# Altium PCB RF315Mhz.PcbDoc
Units mm, origin at the board's own origin, x right, y up, seen from the top; angles counter-clockwise.
Board outline 32.5 x 47.16 mm, 2 copper layers (Top Layer, Bottom Layer); 30 components, 20 nets, 107 pads, 7 vias.
Unrouted connection lines stored in the file: 1.
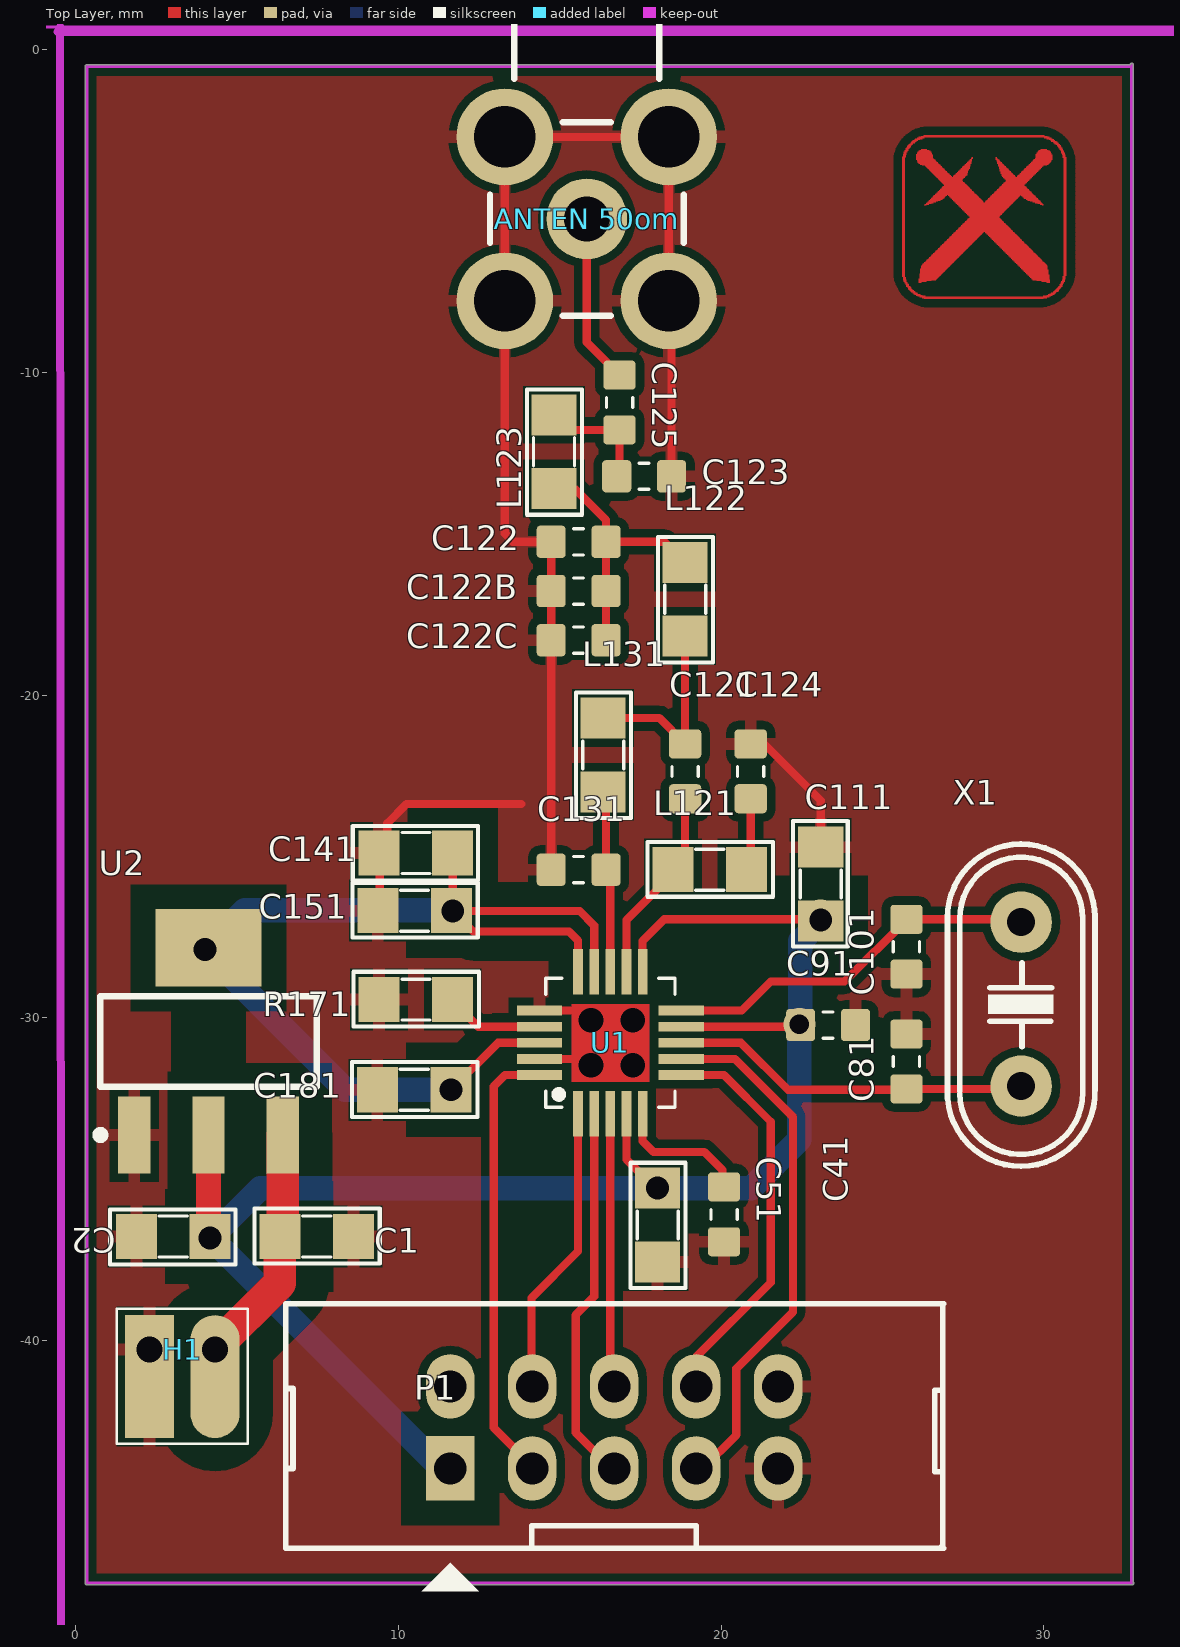
[diagram p0: Top Layer view]
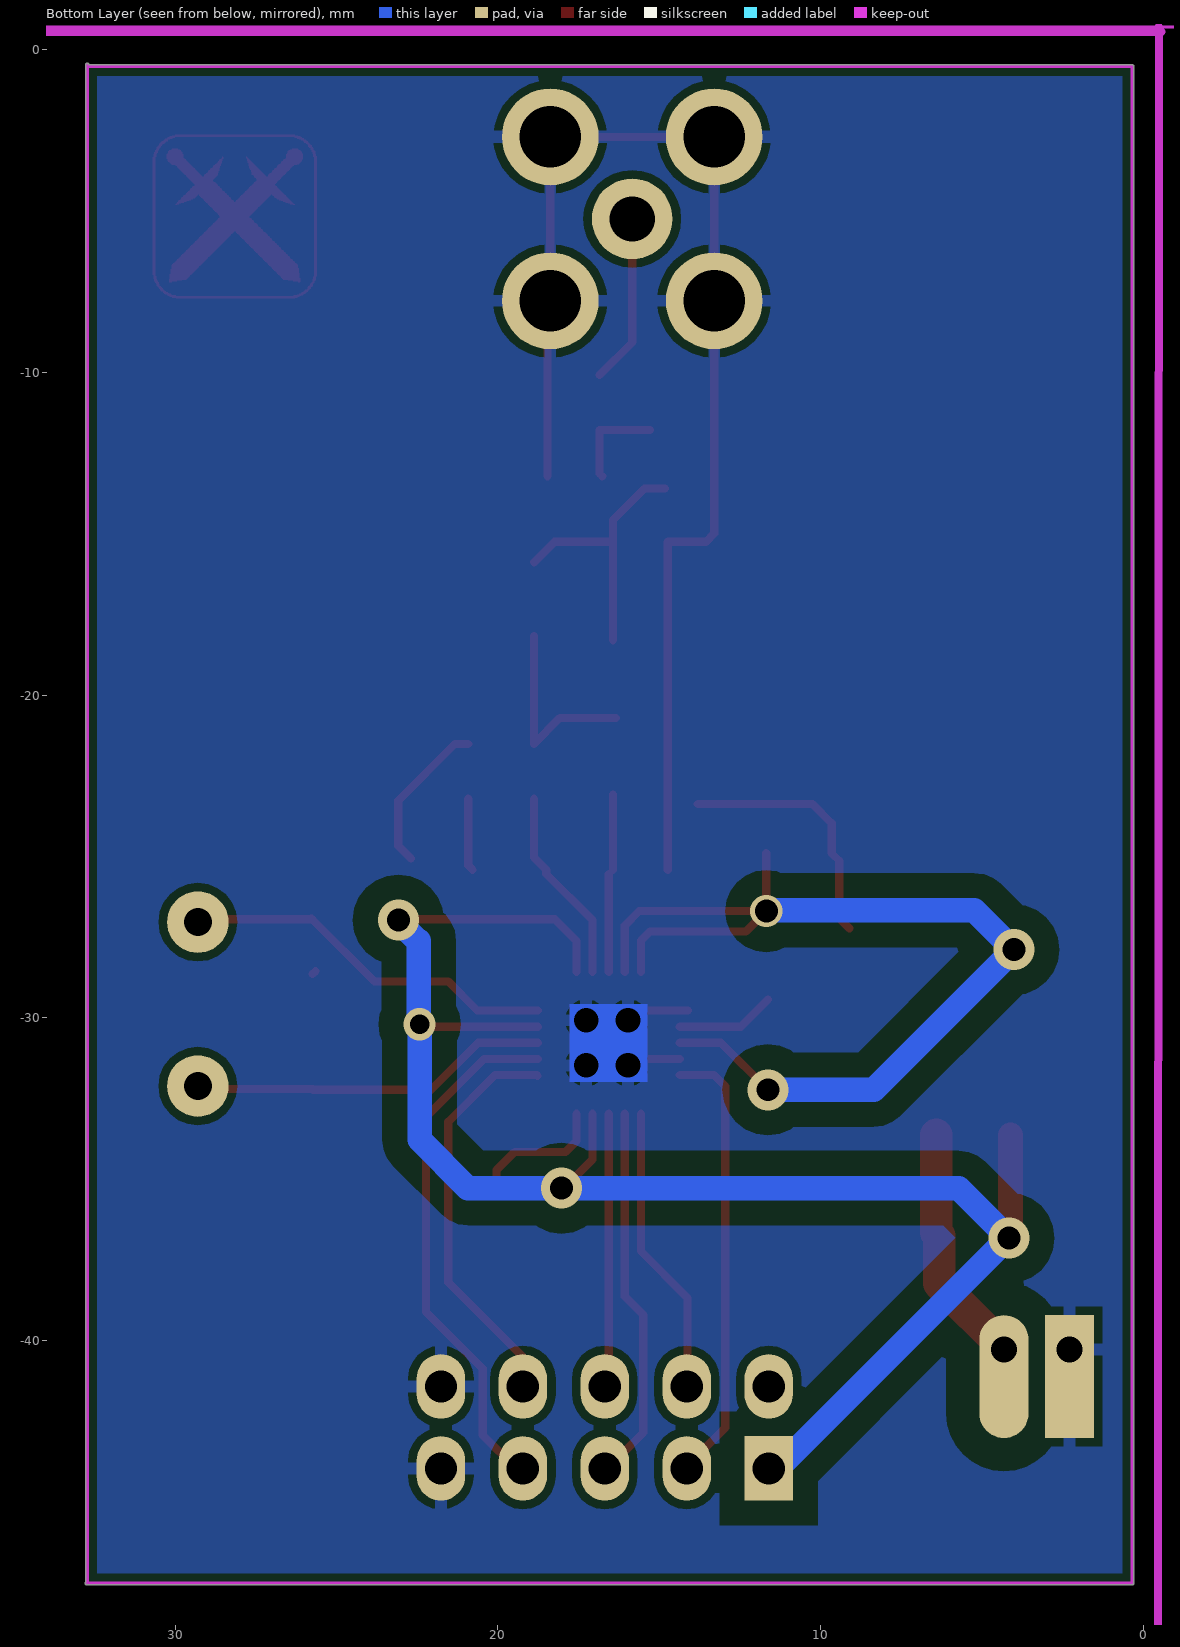
[diagram p1: Bottom Layer view, seen from below]
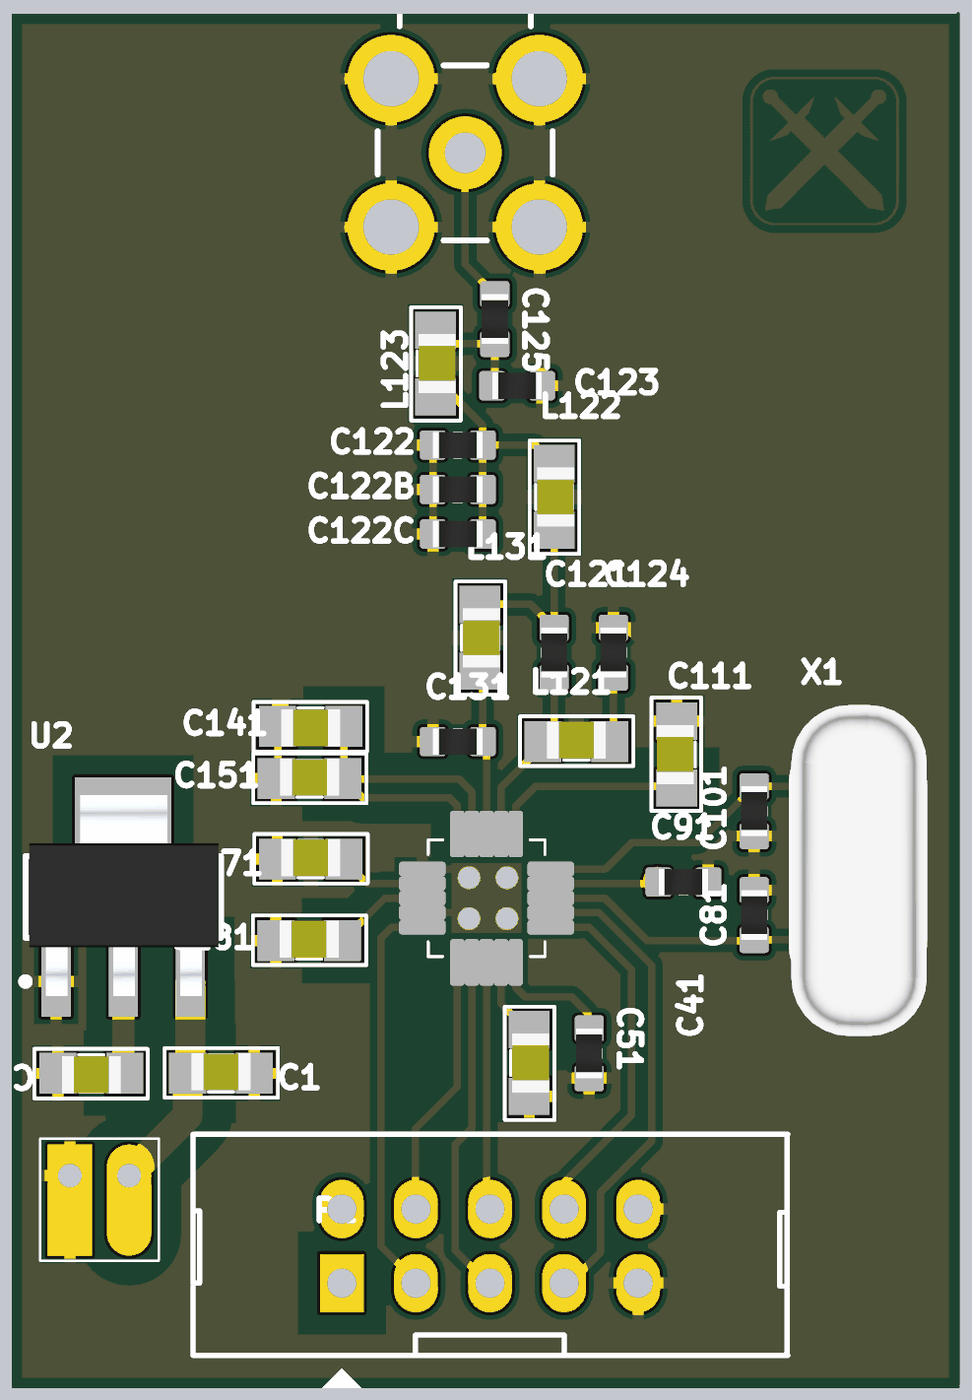
[diagram p2: 3D render of the assembled board from above, using the file's embedded part models]

## Layer stack, top to bottom
Top Layer: signal copper 0.0356
Dielectric: dielectric 0.32, FR-4, Dk 4.8
Bottom Layer: signal copper 0.0356

## Board outline
0.345,-47.574 cw(c0.345,-47.523) 0.294,-47.523 0.294,-0.52 cw(c0.345,-0.52) 0.345,-0.469 32.679,-0.469 cw(c32.73,-0.469) 32.78,-0.469 32.78,-47.459 cw(c32.73,-47.459) 32.773,-47.485 cw(c32.741,-47.523) 32.791,-47.523 cw(c32.741,-47.523) 32.741,-47.574

## Design rules (kind name [scope] priority, off if disabled: settings)
Clearance 5 [InNet('+5V')] p1: gap=1.016
Clearance 3.3 [InNet('+3.3V')] p2: gap=0.762
Clearance [All] p3: gap=0.254
ComponentClearance [All] p1: gap=0.051 collisioncheckmode=3 verticalgap=0.051 showdistances=FALSE
PolygonConnect [All] p1: connectstyle=Relief reliefconductorwidth=0.381 reliefentries=4 polygonreliefangle="90 Angle" airgapwidth=0.254
RoutingVias [All] p1: holewidth=0.711 width=1.27 viastyle="Through Hole" minholewidth=0.711 minwidth=1.27 maxholewidth=0.711 maxwidth=1.27
ShortCircuit [All] p1: allowed=TRUE
SilkToSilkClearance [All] p1: silktosilkclearance=0.051
SilkToSolderMaskClearance [IsPad] p1: minsilkscreentomaskgap=0 clearancetoexposedcopper=TRUE
SolderMaskExpansion [All] p1: expansion=0.102
Width 5v [InNet('+5V')] p1: maxlimit=1.016 minlimit=1.016 preferedwidth=1.016
Width 3.3v [InNet('+3.3V')] p2: maxlimit=0.254 minlimit=0.254 preferedwidth=0.254
Width [All] p3: maxlimit=0.254 minlimit=0.254 preferedwidth=0.254
24 further rules are at their usual default settings.

## Components (designator, comment, footprint, x,y, rotation, side; value= is the part's Value field where it differs from the comment)
"ANTEN 50om" "Header 2" MCX5.08-H5 15.839,1.258 r270 top
C1 "104" SM-0805 7.468,-36.779 r180 top
C2 "104" SM-0805 3.023,-36.779 r0 top
C41 "104" SM-0805 18.034,-36.424 r90 top
C51 "104" 0603ESDA#1 20.091,-36.093 r90 top
C81 "27pF" 0603ESDA#1 25.745,-31.355 r270 top
C91 "103" 0603ESDA#2 23.317,-30.226 r180 top
C101 "27pF" 0603ESDA#1 25.745,-27.799 r90 top
C111 "220pF" SM-0805 23.089,-25.857 r270 top
C121 "6.8pF" 0603ESDA#1 18.887,-22.364 r270 top
C122 "12pF" 0603ESDA#1 15.585,-15.252 r180 top
C122B "12pF" 0603ESDA#1 15.585,-16.776 r180 top
C122C "12pF" 0603ESDA#1 15.585,-18.3 r180 top
C123 "6.8pF" 0603ESDA#1 17.617,-13.22 r0 top
C124 "220pF" 0603ESDA#1 20.919,-22.364 r270 top
C125 "220pF" 0603ESDA#1 16.855,-10.934 r90 top
C131 "6.8pF" 0603ESDA#1 15.585,-25.412 r180 top
C141 "103" SM-0805 10.541,-24.892 r0 top
C151 "220pF" SM-0805 10.505,-26.682 r180 top
C181 "220pF" SM-0805 10.49,-32.233 r180 top
H1 "Header 2" HDR1X2 2.032,-40.284 r0 top
L121 "33nH" SM-0805 19.649,-25.412 r180 top
L122 "18nH" SM-0805 18.887,-17.03 r90 top
L123 "33nH" SM-0805 14.823,-12.458 r90 top
L131 "33nH" SM-0805 16.347,-21.856 r90 top
P1 "Header 6" Hed2X5 11.608,-43.967 r0 top
R171 "56K" SM-0805 10.541,-29.439 r180 top
U1 "CC1101" QFN-20Pin 14.569,-32.778 r90 top
U2 "LM1117" SOT223-4N 4.115,-30.734 r90 top
X1 "26Mhz" XT2 29.301,-29.577 r90 top

## Footprints (in the part's own frame and the unit in brackets; to place one, negate y for a bottom-side part, rotate by r counter-clockwise, add the part's x,y. Pads: shape width x height; smd on the part's side, far side on the other; paste and mask are expansions set on the pad)
0603ESDA#1 [mm] "Chip ESD suppressor, Body 1.6x0.8mm, 0603, IPC Medium Density"
  round 0.254 on Mech14: 0(0,0)
  rrect25% 0.9x1 smd: 1(-0.85,0) 2(0.85,0)
  Top Layer pour cut-out: -0.4,0.6 0.4,0.6 0.4,-0.6 -0.4,-0.6
  silkscreen extent -0.15,-0.41 0.15,0.41, body extent -0.85,-0.45 0.85,0.45, height 0.79
0603ESDA#2 [mm] "Chip ESD suppressor, Body 1.6x0.8mm, 0603, IPC Medium Density"
  round 0.254 on Mech15: 0(0,0)
  rrect25% 0.9x1 smd: 1(-0.85,0) 2(0.85,0)
  Top Layer pour cut-out: -0.65,0.5 -0.45,0.7 0.45,0.7 0.65,0.5 0.65,-0.5 0.45,-0.7 -0.45,-0.7 -0.65,-0.5
  silkscreen extent -0.15,-0.41 0.15,0.41, body extent -0.85,-0.45 0.85,0.45, height 0.79
HDR1X2 [mil] "Connector; Header; 2 Position"
  rect 60x150 hole 32 copper offset 0,-33: 1(10,0)
  oval 60x150 hole 32 copper offset 0,-33: 2(90,0)
  silkscreen extent -30,-115 130,50
Hed2X5 [mm] "Header 10x2,20 pin, connecter"
  rect 1.5x2 hole 1: 1(0,0)
  oval 1.5x2 hole 1: 2(0,2.54) 3(2.54,0) 4(2.54,2.54) 5(5.08,0) 6(5.08,2.54) 7(7.62,0) 8(7.62,2.54) 9(10.16,0) 10(10.16,2.54)
  silkscreen extent -5.1,-3.81 15.29,5.11
MCX5.08-H5 [mm] "Chan anten"
  round 2.5 hole 1.4: 1(6.5,0)
  round 3 hole 1.9: 2(3.96,2.54) 2(3.96,-2.54) 2(9.04,-2.54) 2(9.04,2.54)
  silkscreen extent 0,-3 9.5,3
QFN-20Pin [mm] "QFN 20pin 4x4mm"
  rect 1.4x0.3 smd paste+0.1 mask+0.1: 1(-0.2,-1) 2(-0.2,-1.5) 3(-0.2,-2) 4(-0.2,-2.5) 5(-0.2,-3) 11(4.2,-3) 12(4.2,-2.5) 13(4.2,-2) 14(4.2,-1.5) 15(4.2,-1)
  rect 0.3x1.4 smd paste+0.1 mask+0.1: 6(1,-4.2) 7(1.5,-4.2) 8(2,-4.2) 9(2.5,-4.2) 10(3,-4.2) 16(3,0.2) 17(2.5,0.2) 18(2,0.2) 19(1.5,0.2) 20(1,0.2)
  round 0 hole 0.762: 21(1.3,-1.4) 21(1.3,-2.7) 21(2.7,-2.7) 21(2.7,-1.4)
  Top Layer region: 0.8,-0.8 3.2,-0.8 3.2,-3.2 0.8,-3.2
  Bottom Layer region: 0.8,-0.8 3.2,-0.8 3.2,-3.2 0.8,-3.2
  Top Overlay keep-out circle w0.254: c0.4,-0.4 r0.1
  silkscreen extent 0,-4 4,0
SM-0805 [mil] "Compoment SMD 80x50mil"
  rect 50x55 smd: 1(-45,0) 2(45,0)
  silkscreen extent -77,-34 76,33, body extent -40,-27 40,23, height 24
SOT223-4N [mm] "SOT223, 4-Leads, Body 6.5x3.5mm, Pitch 2.3mm, Lead Span 7mm, IPC Medium Density"
  rect 2.4x1 smd: 1(-2.9,2.3) 2(-2.9,0) 3(-2.9,-2.3)
  rect 2.4x3.3 smd: 4(2.9,0)
  silkscreen extent -3.02,-3.35 1.4,3.47, body extent -3.39,-3.27 3.5,3.23, height 1.72
XT2 [mil] "Footpin for Crystal 2 pin"
  round 75 hole 34: 1(-100,0) 2(100,0)
  silkscreen extent -198,-90 195,90, body extent -233,-93 213,90, height 138

## Part data
"ANTEN 50om" H1: library part Hed2, "Header 2 (Green)"
C1 C2: library part Cap, "Capacitor"
C41 C51 C81 C91 C101 C111 C121 C122 C122B C122C C123 C124 C125 C131 C141 C151 C181: library part CM, "Cap SMD"
L121 L122 L123 L131: library part L1, "Inductor"
P1: "Header, 6-Pin"
R171: library part RM, "Resistor SMD"
U1: "Transceiver 315Mhz"
U2: "3v3"
X1: library part XT2, "Crystal For all Crystal 2pin."

## Via types
v1: diameter 1.27, hole 0.711, Top Layer to Bottom Layer, 5 vias
v2: diameter 1, hole 0.711, Top Layer to Bottom Layer, 1 vias
v3: diameter 1, hole 0.6, Top Layer to Bottom Layer, 1 vias

## Nets (pads, with @x,y where several pads share a name; then routed paths per layer and width w, separated by ;. In a path a pad name is that pad's centre, name@x,y a point inside that pad or via, vN(x,y) a via of type N, cw(c..) or ccw(c..) an arc to the next point about the centre after c; other vN are vias at no path point)
+3.3V: C2.2 C41.2 C91.2 C111.2 C141.2 C151.1 C181.1 P1.1 U1.4 U1.9 U1.11 U1.14 U1.15 U1.18 U2.2 U2.4 | length 87.6
  Top Layer w0.254: v1(11.633,-32.233) 13.088,-30.778 U1.18 ; C151.1@11.684,-26.67 C141.2 ; U1.15 15.569,-27.608 15.291,-27.33 12.319,-27.33 v2(11.684,-26.695) 15.621,-26.695 16.069,-27.143 U1.14 ; U1.4 17.069,-34.391 C41.2@17.958,-35.281 ; U1.11 17.569,-27.618 18.237,-26.949 23.114,-26.949 C111.2@23.165,-27 ; U1.9 22.453,-30.278 C91.2@22.479,-30.251
  Top Layer w0.762: U2.4@4.013,-27.838 U2.4@4.115,-27.94 ; C2.2@4.115,-36.83 U2.2
  Bottom Layer w0.254: v3@22.377,-30.226 v3@22.454,-30.15 ; 22.454,-27.61 22.479,-27.61
  Bottom Layer w0.762: v1(4.166,-36.83) v1@4.178,-36.817 ; P1.1 11.328,-43.967 v1@4.178,-36.817 ; v1(11.633,-32.233) 8.357,-32.233 v1(4.013,-27.889) 5.232,-26.67 v2@11.659,-26.67 ; v1(18.034,-35.281) 20.93,-35.281 22.428,-33.782 22.428,-30.277 v3@22.454,-30.251 ; v1@18.034,-35.23 17.983,-35.281 5.715,-35.281 v1@4.178,-36.817 ; v3(22.428,-30.201) v3@22.454,-30.175 ; v3@22.454,-30.15 22.454,-27.61 ; 22.479,-27.61 v1@23.139,-26.949
  other v1: 23.089,-26.975
+5V: C1.2 H1.2 U2.3 | length 7.5
  Top Layer w1.016: H1.2@4.267,-40.284 6.325,-38.227 C1.2 ; C1.2@6.325,-36.754 6.415,-36.664 U2.3
CSN: P1.7 U1.7 | length 16.5
  Top Layer w0.254: U1.7 20.432,-31.278 22.225,-33.071 22.225,-39.116 20.472,-40.869 20.472,-42.926 19.431,-43.967 P1.7 P1.7@19.202,-43.967
GDO0: P1.8 U1.6 | length 12.5
  Top Layer w0.254: U1.6@18.771,-31.801 18.796,-31.775 20.091,-31.775 21.539,-33.223 21.539,-38.202 19.228,-40.513 P1.8
GDO2: P1.6 U1.3 | length 8.5
  Top Layer w0.254: U1.3 16.569,-41.283 P1.6@16.688,-41.402
GND: "ANTEN 50om.2" C1.1 C2.1 C41.1 C51.1 C81.1 C91.1 C101.1 C111.1 C122.2 C122B.2 C122C.2 C123.2 C124.1 C131.2 C141.1 C151.2 C181.2 H1.1 P1.9 P1.10 R171.2 U1.16 U1.19 U1.21 U2.1 | length 56
  Top Layer w0.254: C151.2@9.108,-27.229 C151.2@9.655,-26.682 ; C151.2@9.423,-26.45 9.423,-25.135 9.655,-24.904 9.655,-23.976 10.251,-23.38 13.807,-23.38 ; U1.16@14.109,-29.778 U1.16 15.63,-29.778 15.951,-30.099 ; U1.19 15.834,-31.278 16.002,-31.445 ; C131.2 14.735,-24.308 C122C.2 C122B.2 C122.2 13.553,-15.252 13.299,-14.998 13.299,-7.782 13.299,-2.702 18.379,-2.702 18.379,-7.782 18.467,-7.87 C123.2 ; C124.1 21.339,-21.514 23.089,-23.264 23.089,-24.678 C111.1@22.697,-25.07 ; C101.1@25.657,-28.561 C101.1
"NetANTEN 50om_1": "ANTEN 50om.1" C125.2 | length 5.3
  Top Layer w0.254: 15.839,-5.242 15.839,-9.068 C125.2
NetC51_2: C51.2 U1.5 | length 4.2
  Top Layer w0.254: U1.5 17.569,-33.825 17.907,-34.163 19.482,-34.163 20.041,-34.722 C51.2@20.041,-35.255
NetC81_2: C81.2 U1.8 X1.1 | length 11
  Top Layer w0.254: U1.8 20.618,-30.778 22.073,-32.233 C81.2@25.73,-32.233 ; C81.2 X1.1@29.213,-32.205
NetC101_2: C101.2 U1.10 X1.2 | length 11.8
  Top Layer w0.254: U1.10 20.641,-29.778 21.539,-28.88 23.825,-28.88 C101.2@25.756,-26.949 ; C101.2@25.781,-26.924 C101.2@25.756,-26.949 ; X1.2 29.213,-26.949 C101.2@25.756,-26.949
NetC121_1: C121.1 L122.1 L131.2 | length 6.2
  Top Layer w0.254: L131.2 18.086,-20.713 C121.1 L122.1
NetC121_2: C121.2 L121.2 U1.12 | length 6.1
  Top Layer w0.254: U1.12 17.069,-26.976 18.506,-25.539 L121.2 18.887,-25.031 C121.2
NetC122_1: C122.1 C122B.1 C122C.1 L122.2 L123.1 | length 8.5
  Top Layer w0.254: L123.1 15.458,-13.601 16.435,-14.578 C122.1 ; C122C.1 C122B.1 C122.1 ; L122.2 18.252,-15.252 C122.1
NetC123_1: C123.1 C125.1 L123.2 | length 3
  Top Layer w0.254: L123.2@15.292,-11.784 C125.1 16.855,-13.132 C123.1
NetC124_2: C124.2 L121.1 | length 2.3
  Top Layer w0.254: L121.1 20.919,-25.285 C124.2
NetC131_1: C131.1 L131.1 U1.13 | length 5.4
  Top Layer w0.254: C131.1 L131.1@16.435,-23.087 ; U1.13 C131.1@16.569,-25.546
NetR171_1: R171.1 U1.17 | length 3.1
  Top Layer w0.254: R171.1@11.633,-29.439 12.472,-30.278 U1.17
SCK: P1.4 U1.1 | length 9
  Top Layer w0.254: P1.4@14.122,-41.427 14.122,-38.684 15.569,-37.238 U1.1
SI: P1.3 U1.20 | length 13.9
  Top Layer w0.254: P1.3@14.199,-43.942 12.954,-42.697 12.954,-32.131 13.307,-31.778 U1.20
SO: P1.5 U1.2 | length 11.8
  Top Layer w0.254: U1.2 16.069,-38.643 15.494,-39.218 15.494,-42.85 P1.5@16.713,-44.069
pads on no net: C51.0 C81.0 C91.0 C101.0 C121.0 C122.0 C122B.0 C122C.0 C123.0 C124.0 C125.0 C131.0 P1.2
copper on no net: | length 404.2
  Top Layer w0.025: 25.618,-7.022 25.694,-7.022 ; 25.618,-6.997 25.694,-6.997 ; 25.618,-6.971 25.694,-6.971 ; 25.618,-6.946 25.694,-6.946 ; 25.618,-6.92 25.694,-6.92 ; 25.618,-6.895 25.694,-6.895 ; 25.618,-6.87 25.694,-6.87 ; 25.618,-6.844 25.694,-6.844 ; 25.618,-6.819 25.694,-6.819 ; 25.618,-6.793 25.694,-6.793 ; 25.618,-6.768 25.694,-6.768 ; 25.618,-6.743 25.694,-6.743 ; 25.618,-6.717 25.694,-6.717 ; 25.618,-6.692 25.694,-6.692 ; 25.618,-6.666 25.694,-6.666 ; 25.618,-6.641 25.694,-6.641 ; 25.618,-6.616 25.694,-6.616 ; 25.618,-6.59 25.694,-6.59 ; 25.618,-6.565 25.694,-6.565 ; 25.618,-6.539 25.694,-6.539 ; 25.618,-6.514 25.694,-6.514 ; 25.618,-6.489 25.694,-6.489 ; 25.618,-6.463 25.694,-6.463 ; 25.618,-6.438 25.694,-6.438 ; 25.618,-6.412 25.694,-6.412 ; 25.618,-6.387 25.694,-6.387 ; 25.618,-6.362 25.694,-6.362 ; 25.618,-6.336 25.694,-6.336 ; 25.618,-6.311 25.694,-6.311 ; 25.618,-6.285 25.694,-6.285 ; 25.618,-6.26 25.694,-6.26 ; 25.618,-6.235 25.694,-6.235 ; 25.618,-6.209 25.694,-6.209 ; 25.618,-6.184 25.694,-6.184 ; 25.618,-6.158 25.694,-6.158 ; 25.618,-6.133 25.694,-6.133 ; 25.618,-6.108 25.694,-6.108 ; 25.618,-6.082 25.694,-6.082 ; 25.618,-6.057 25.694,-6.057 ; 25.618,-6.031 25.694,-6.031 ; 25.618,-6.006 25.694,-6.006 ; 25.618,-5.981 25.694,-5.981 ; 25.618,-5.955 25.694,-5.955 ; 25.618,-5.93 25.694,-5.93 ; 25.618,-5.904 25.694,-5.904 ; 25.618,-5.879 25.694,-5.879 ; 25.618,-5.854 25.694,-5.854 ; 25.618,-5.828 25.694,-5.828 ; 25.618,-5.803 25.694,-5.803 ; 25.618,-5.777 25.694,-5.777 ; 25.618,-5.752 25.694,-5.752 ; 25.618,-5.727 25.694,-5.727 ; 25.618,-5.701 25.694,-5.701 ; 25.618,-5.676 25.694,-5.676 ; 25.618,-5.65 25.694,-5.65 ; 25.618,-5.625 25.694,-5.625 ; 25.618,-5.6 25.694,-5.6 ; 25.618,-5.574 25.694,-5.574 ; 25.618,-5.549 25.694,-5.549 ; 25.618,-5.523 25.694,-5.523 ; 25.618,-5.498 25.694,-5.498 ; 25.618,-5.473 25.694,-5.473 ; 25.618,-5.447 25.694,-5.447 ; 25.618,-5.422 25.694,-5.422 ; 25.618,-5.396 25.694,-5.396 ; 25.618,-5.371 25.694,-5.371 ; 25.618,-5.346 25.694,-5.346 ; 25.618,-5.32 25.694,-5.32 ; 25.618,-5.295 25.694,-5.295 ; 25.618,-5.269 25.694,-5.269 ; 25.618,-5.244 25.694,-5.244 ; 25.618,-5.219 25.694,-5.219 ; 25.618,-5.193 25.694,-5.193 ; 25.618,-5.168 25.694,-5.168 ; 25.618,-5.142 25.694,-5.142 ; 25.618,-5.117 25.694,-5.117 ; 25.618,-5.092 25.694,-5.092 ; 25.618,-5.066 25.694,-5.066 ; 25.618,-5.041 25.694,-5.041 ; 25.618,-5.015 25.694,-5.015 ; 25.618,-4.99 25.694,-4.99 ; 25.618,-4.965 25.694,-4.965 ; 25.618,-4.939 25.694,-4.939 ; 25.618,-4.914 25.694,-4.914 ; 25.618,-4.888 25.694,-4.888 ; 25.618,-4.863 25.694,-4.863 ; 25.618,-4.838 25.694,-4.838 ; 25.618,-4.812 25.694,-4.812 ; 25.618,-4.787 25.694,-4.787 ; 25.618,-4.761 25.694,-4.761 ; 25.618,-4.736 25.694,-4.736 ; 25.618,-4.711 25.694,-4.711 ; 25.618,-4.685 25.694,-4.685 ; 25.618,-4.66 25.694,-4.66 ; 25.618,-4.634 25.694,-4.634 ; 25.618,-4.609 25.694,-4.609 ; 25.618,-4.584 25.694,-4.584 ; 25.618,-4.558 25.694,-4.558 ; 25.618,-4.533 25.694,-4.533 ; 25.618,-4.507 25.694,-4.507 ; 25.618,-4.482 25.694,-4.482 ; 25.618,-4.457 25.694,-4.457 ; 25.618,-4.431 25.694,-4.431 ; 25.618,-4.406 25.694,-4.406 ; 25.618,-4.38 25.694,-4.38 ; 25.618,-4.355 25.694,-4.355 ; 25.618,-4.33 25.694,-4.33 ; 25.618,-4.304 25.694,-4.304 ; 25.618,-4.279 25.694,-4.279 ; 25.618,-4.253 25.694,-4.253 ; 25.618,-4.228 25.694,-4.228 ; 25.618,-4.203 25.694,-4.203 ; 25.618,-4.177 25.694,-4.177 ; 25.618,-4.152 25.694,-4.152 ; 25.618,-4.126 25.694,-4.126 ; 25.618,-4.101 25.694,-4.101 ; 25.618,-4.076 25.694,-4.076 ; 25.618,-4.05 25.694,-4.05 ; 25.618,-4.025 25.694,-4.025 ; 25.618,-3.999 25.694,-3.999 ; 25.618,-3.974 25.694,-3.974 ; 25.618,-3.949 25.694,-3.949 ; 25.618,-3.923 25.694,-3.923 ; 25.618,-3.898 25.694,-3.898 ; 25.618,-3.872 25.694,-3.872 ; 25.618,-3.847 25.694,-3.847 ; 25.618,-3.822 25.694,-3.822 ; 25.618,-3.796 25.694,-3.796 ; 25.618,-3.771 25.694,-3.771 ; 25.618,-3.745 25.694,-3.745 ; 25.618,-3.72 25.694,-3.72 ; 25.618,-3.695 25.694,-3.695 ; 25.618,-3.669 25.694,-3.669 ; 25.618,-3.644 25.694,-3.644 ; 25.618,-3.618 25.694,-3.618 ; 25.618,-3.593 25.694,-3.593 ; 25.618,-3.568 25.694,-3.568 ; 25.618,-3.542 25.694,-3.542 ; 25.618,-3.517 25.694,-3.517 ; 25.618,-3.491 25.694,-3.491 ; 25.618,-3.466 25.694,-3.466 ; 25.618,-3.441 25.694,-3.441 ; 25.618,-3.415 25.694,-3.415 ; 25.618,-3.39 25.694,-3.39 ; 25.618,-3.364 25.694,-3.364 ; 25.618,-3.339 25.694,-3.339 ; 25.618,-3.314 25.719,-3.314 ; 25.643,-7.124 25.745,-7.124 ; 25.643,-7.098 25.719,-7.098 ; 25.643,-7.073 25.719,-7.073 ; 25.643,-7.047 25.719,-7.047 ; 25.643,-3.288 25.719,-3.288 ; 25.643,-3.263 25.719,-3.263 ; 25.643,-3.237 25.745,-3.237 ; 25.668,-7.174 25.745,-7.174 ; 25.668,-7.149 25.745,-7.149 ; 25.668,-3.212 25.745,-3.212 ; 25.668,-3.187 25.745,-3.187 ; 25.668,-3.161 25.77,-3.161 ; 25.694,-7.225 25.77,-7.225 ; 25.694,-7.2 25.77,-7.2 ; 25.694,-3.136 25.77,-3.136 ; 25.694,-3.11 25.795,-3.11 ; 25.719,-7.276 25.821,-7.276 ; 25.719,-7.251 25.795,-7.251 ; 25.719,-3.085 25.795,-3.085 ; 25.719,-3.06 25.821,-3.06 ; 25.745,-7.327 25.846,-7.327 ; 25.745,-7.301 25.821,-7.301 ; 25.745,-3.034 25.846,-3.034 ; 25.77,-7.352 25.872,-7.352 ; 25.77,-3.009 25.872,-3.009 ; 25.77,-2.983 25.872,-2.983 ; 25.795,-7.403 25.897,-7.403 ; 25.795,-7.378 25.897,-7.378 ; 25.795,-2.958 25.897,-2.958 ; 25.821,-7.428 25.922,-7.428 ; 25.821,-2.933 25.922,-2.933 ; 25.846,-7.454 25.973,-7.454 ; 25.846,-2.907 25.948,-2.907 ; 25.872,-7.479 25.999,-7.479 ; 25.872,-2.882 25.999,-2.882 ; 25.897,-7.505 26.024,-7.505 ; 25.897,-2.856 26.024,-2.856 ; 25.922,-2.831 26.049,-2.831 ; 25.948,-7.53 26.075,-7.53 ; 25.948,-2.806 26.1,-2.806 ; 25.973,-7.555 26.1,-7.555 ; 25.999,-7.581 26.176,-7.581 ; 25.999,-2.78 26.151,-2.78 ; 26.024,-2.755 26.227,-2.755 ; 26.049,-7.606 26.227,-7.606 ; 26.049,-3.39 26.608,-3.39 ; 26.049,-3.364 26.583,-3.364 ; 26.049,-3.339 26.557,-3.339 ; 26.049,-3.314 26.557,-3.314 ; 26.049,-3.288 26.557,-3.288 ; 26.049,-3.263 26.557,-3.263 ; 26.049,-3.237 26.532,-3.237 ; 26.075,-3.441 26.659,-3.441 ; 26.075,-3.415 26.634,-3.415 ; 26.075,-3.212 26.532,-3.212 ; 26.075,-3.187 26.507,-3.187 ; 26.075,-2.729 26.303,-2.729 ; 26.1,-7.632 26.329,-7.632 ; 26.1,-3.491 26.71,-3.491 ; 26.1,-3.466 26.684,-3.466 ; 26.1,-3.161 26.507,-3.161 ; 26.126,-7.2 26.202,-7.2 ; 26.126,-7.174 26.354,-7.174 ; 26.126,-7.149 26.507,-7.149 ; 26.126,-7.124 26.659,-7.124 ; 26.126,-7.098 26.684,-7.098 ; 26.126,-3.517 26.735,-3.517 ; 26.126,-3.136 26.481,-3.136 ; 26.126,-2.704 30.164,-2.704 ; 26.151,-7.657 30.164,-7.657 ; 26.151,-7.073 26.71,-7.073 ; 26.151,-7.047 26.735,-7.047 ; 26.151,-7.022 26.761,-7.022 ; 26.151,-6.997 26.786,-6.997 ; 26.151,-6.971 26.811,-6.971 ; 26.151,-6.946 26.837,-6.946 ; 26.151,-3.11 26.43,-3.11 ; 26.176,-6.92 26.862,-6.92 ; 26.176,-6.895 26.888,-6.895 ; 26.176,-6.87 26.913,-6.87 ; 26.176,-6.844 26.938,-6.844 ; 26.176,-6.819 26.964,-6.819 ; 26.176,-6.793 26.989,-6.793 ; 26.176,-3.542 26.761,-3.542 ; 26.202,-6.768 27.015,-6.768 ; 26.202,-6.743 27.04,-6.743 ; 26.202,-6.717 27.065,-6.717 ; 26.202,-6.692 27.091,-6.692 ; 26.202,-3.085 26.38,-3.085 ; 26.202,-2.679 30.113,-2.679 ; 26.227,-7.682 30.088,-7.682 ; 26.227,-6.666 27.116,-6.666 ; 26.227,-3.568 26.786,-3.568 ; 26.253,-6.641 27.142,-6.641 ; 26.278,-6.616 27.167,-6.616 ; 26.278,-2.653 30.012,-2.653 ; 26.303,-7.708 29.986,-7.708 ; 26.303,-6.59 27.192,-6.59 ; 26.303,-4.812 26.354,-4.812 ; 26.329,-6.565 27.218,-6.565 ; 26.329,-4.787 26.43,-4.787 ; 26.329,-3.593 26.811,-3.593 ; 26.354,-6.539 27.243,-6.539 ; 26.354,-4.761 26.507,-4.761 ; 26.354,-3.618 26.837,-3.618 ; 26.38,-6.514 27.269,-6.514 ; 26.38,-4.736 26.583,-4.736 ; 26.38,-3.644 26.862,-3.644 ; 26.405,-6.489 27.294,-6.489 ; 26.405,-4.711 26.659,-4.711 ; 26.405,-3.669 26.888,-3.669 ; 26.43,-6.463 27.319,-6.463 ; 26.43,-4.685 26.71,-4.685 ; 26.43,-3.695 26.913,-3.695 ; 26.456,-6.438 27.345,-6.438 ; 26.456,-4.66 26.786,-4.66 ; 26.456,-3.72 26.938,-3.72 ; 26.481,-6.412 27.37,-6.412 ; 26.481,-4.634 26.862,-4.634 ; 26.481,-3.745 26.964,-3.745 ; 26.507,-6.387 27.396,-6.387 ; 26.507,-4.609 26.888,-4.609 ; 26.507,-3.771 26.989,-3.771 ; 26.532,-6.362 27.421,-6.362 ; 26.532,-4.584 26.913,-4.584 ; 26.532,-3.796 27.015,-3.796 ; 26.557,-6.336 27.446,-6.336 ; 26.557,-4.558 26.938,-4.558 ; 26.557,-3.822 27.04,-3.822 ; 26.583,-6.311 27.472,-6.311 ; 26.583,-4.533 26.964,-4.533 ; 26.583,-3.847 27.065,-3.847 ; 26.608,-6.285 27.497,-6.285 ; 26.608,-4.507 26.989,-4.507 ; 26.608,-3.872 27.091,-3.872 ; 26.634,-6.26 27.523,-6.26 ; 26.634,-4.482 27.904,-4.482 ; 26.634,-3.898 27.116,-3.898 ; 26.659,-6.235 27.548,-6.235 ; 26.659,-4.457 27.878,-4.457 ; 26.659,-3.923 27.142,-3.923 ; 26.684,-6.209 27.573,-6.209 ; 26.684,-4.431 27.853,-4.431 ; 26.684,-3.949 27.548,-3.949 ; 26.71,-6.184 27.599,-6.184 ; 26.71,-4.406 27.827,-4.406 ; 26.71,-3.974 27.523,-3.974 ; 26.735,-6.158 27.624,-6.158 ; 26.735,-4.38 27.802,-4.38 ; 26.735,-3.999 27.497,-3.999 ; 26.761,-6.133 27.65,-6.133 ; 26.761,-4.355 27.777,-4.355 ; 26.761,-4.025 27.472,-4.025 ; 26.786,-6.108 27.675,-6.108 ; 26.786,-4.33 27.751,-4.33 ; 26.786,-4.05 27.472,-4.05 ; 26.811,-6.082 27.7,-6.082 ; 26.811,-4.304 27.726,-4.304 ; 26.811,-4.076 27.497,-4.076 ; 26.837,-6.057 27.726,-6.057 ; 26.837,-4.279 27.7,-4.279 ; 26.837,-4.101 27.523,-4.101 ; 26.862,-6.031 27.751,-6.031 ; 26.862,-4.253 27.675,-4.253 ; 26.862,-4.126 27.548,-4.126 ; 26.888,-6.006 27.777,-6.006 ; 26.888,-4.228 27.65,-4.228 ; 26.888,-4.152 27.573,-4.152 ; 26.913,-5.981 27.802,-5.981 ; 26.913,-4.203 27.624,-4.203 ; 26.913,-4.177 27.599,-4.177 ; 26.938,-5.955 27.827,-5.955 ; 26.964,-5.93 27.853,-5.93 ; 26.989,-5.904 27.878,-5.904 ; 27.015,-5.879 27.904,-5.879 ; 27.04,-5.854 27.929,-5.854 ; 27.04,-4.507 27.929,-4.507 ; 27.065,-5.828 27.954,-5.828 ; 27.065,-4.533 27.954,-4.533 ; 27.091,-5.803 27.98,-5.803 ; 27.091,-4.558 27.98,-4.558 ; 27.116,-5.777 28.005,-5.777 ; 27.116,-4.584 28.005,-4.584 ; 27.142,-5.752 28.031,-5.752 ; 27.142,-4.609 28.031,-4.609 ; 27.167,-5.727 28.056,-5.727 ; 27.167,-4.634 28.056,-4.634 ; 27.192,-5.701 28.081,-5.701 ; 27.192,-4.66 28.081,-4.66 ; 27.192,-3.923 27.573,-3.923 ; 27.218,-5.676 28.107,-5.676 ; 27.218,-4.685 28.107,-4.685 ; 27.218,-3.898 27.599,-3.898 ; 27.243,-5.65 28.132,-5.65 ; 27.243,-4.711 28.132,-4.711 ; 27.243,-3.872 27.624,-3.872 ; 27.269,-5.625 29.047,-5.625 ; 27.269,-4.736 29.047,-4.736 ; 27.269,-3.847 27.624,-3.847 ; 27.294,-5.6 29.021,-5.6 ; 27.294,-4.761 29.021,-4.761 ; 27.294,-3.822 27.624,-3.822 ; 27.319,-5.574 28.996,-5.574 ; 27.319,-4.787 28.996,-4.787 ; 27.319,-3.796 27.65,-3.796 ; 27.345,-5.549 28.97,-5.549 ; 27.345,-4.812 28.97,-4.812 ; 27.345,-3.771 27.65,-3.771 ; 27.37,-5.523 28.945,-5.523 ; 27.37,-4.838 28.945,-4.838 ; 27.37,-3.745 27.65,-3.745 ; 27.396,-5.498 28.92,-5.498 ; 27.396,-4.863 28.92,-4.863 ; 27.396,-3.72 27.675,-3.72 ; 27.421,-5.473 28.894,-5.473 ; 27.421,-4.888 28.894,-4.888 ; 27.421,-3.695 27.675,-3.695 ; 27.446,-5.447 28.869,-5.447 ; 27.446,-4.914 28.869,-4.914 ; 27.446,-3.669 27.7,-3.669 ; 27.472,-5.422 28.843,-5.422 ; 27.472,-4.939 28.843,-4.939 ; 27.472,-3.644 27.7,-3.644 ; 27.497,-5.396 28.818,-5.396 ; 27.497,-4.965 28.818,-4.965 ; 27.497,-3.618 27.7,-3.618 ; 27.523,-5.371 28.793,-5.371 ; 27.523,-4.99 28.793,-4.99 ; 27.523,-3.593 27.726,-3.593 ; 27.548,-5.346 28.767,-5.346 ; 27.548,-5.015 28.767,-5.015 ; 27.548,-3.568 27.726,-3.568 ; 27.573,-5.32 28.742,-5.32 ; 27.573,-5.041 28.742,-5.041 ; 27.573,-3.542 27.726,-3.542 ; 27.599,-5.295 28.716,-5.295 ; 27.599,-5.066 28.716,-5.066 ; 27.599,-3.517 27.751,-3.517 ; 27.624,-5.269 28.691,-5.269 ; 27.624,-5.092 28.691,-5.092 ; 27.624,-3.491 27.751,-3.491 ; 27.65,-5.244 28.666,-5.244 ; 27.65,-5.117 28.666,-5.117 ; 27.65,-3.466 27.751,-3.466 ; 27.675,-5.219 28.64,-5.219 ; 27.675,-5.142 28.64,-5.142 ; 27.675,-3.441 27.777,-3.441 ; 27.7,-5.193 28.615,-5.193 ; 27.7,-5.168 28.615,-5.168 ; 27.7,-3.415 27.777,-3.415 ; 27.726,-3.39 27.777,-3.39 ; 27.751,-3.364 27.802,-3.364 ; 27.777,-3.339 27.802,-3.339 ; 28.183,-5.65 29.072,-5.65 ; 28.183,-4.711 29.072,-4.711 ; 28.208,-5.676 29.097,-5.676 ; 28.208,-4.685 29.097,-4.685 ; 28.234,-5.701 29.123,-5.701 ; 28.234,-4.66 29.123,-4.66 ; 28.259,-5.727 29.148,-5.727 ; 28.259,-4.634 29.148,-4.634 ; 28.285,-5.752 29.174,-5.752 ; 28.285,-4.609 29.174,-4.609 ; 28.31,-5.777 29.199,-5.777 ; 28.31,-4.584 29.199,-4.584 ; 28.335,-5.803 29.224,-5.803 ; 28.335,-4.558 29.224,-4.558 ; 28.361,-5.828 29.25,-5.828 ; 28.361,-4.533 29.25,-4.533 ; 28.386,-5.854 29.275,-5.854 ; 28.386,-4.507 29.275,-4.507 ; 28.412,-5.879 29.301,-5.879 ; 28.412,-4.482 29.682,-4.482 ; 28.437,-5.904 29.326,-5.904 ; 28.437,-4.457 29.656,-4.457 ; 28.462,-5.93 29.351,-5.93 ; 28.462,-4.431 29.631,-4.431 ; 28.488,-5.955 29.377,-5.955 ; 28.488,-4.406 29.605,-4.406 ; 28.513,-5.981 29.402,-5.981 ; 28.513,-4.38 29.58,-4.38 ; 28.513,-3.39 28.589,-3.39 ; 28.513,-3.364 28.564,-3.364 ; 28.513,-3.339 28.539,-3.339 ; 28.539,-6.006 29.428,-6.006 ; 28.539,-4.355 29.555,-4.355 ; 28.539,-3.441 28.64,-3.441 ; 28.539,-3.415 28.615,-3.415 ; 28.564,-6.031 29.453,-6.031 ; 28.564,-4.33 29.529,-4.33 ; 28.564,-3.517 28.716,-3.517 ; 28.564,-3.491 28.691,-3.491 ; 28.564,-3.466 28.666,-3.466 ; 28.589,-6.057 29.478,-6.057 ; 28.589,-4.304 29.504,-4.304 ; 28.589,-3.593 28.793,-3.593 ; 28.589,-3.568 28.767,-3.568 ; 28.589,-3.542 28.742,-3.542 ; 28.615,-6.082 29.504,-6.082 ; 28.615,-4.279 29.478,-4.279 ; 28.615,-3.669 28.869,-3.669 ; 28.615,-3.644 28.843,-3.644 ; 28.615,-3.618 28.818,-3.618 ; 28.64,-6.108 29.529,-6.108 ; 28.64,-4.253 29.453,-4.253 ; 28.64,-3.745 28.945,-3.745 ; 28.64,-3.72 28.92,-3.72 ; 28.64,-3.695 28.894,-3.695 ; 28.666,-6.133 29.555,-6.133 ; 28.666,-4.228 29.428,-4.228 ; 28.666,-3.822 29.021,-3.822 ; 28.666,-3.796 28.996,-3.796 ; 28.666,-3.771 28.97,-3.771 ; 28.691,-6.158 29.58,-6.158 ; 28.691,-4.203 29.402,-4.203 ; 28.691,-3.898 29.097,-3.898 ; 28.691,-3.872 29.072,-3.872 ; 28.691,-3.847 29.047,-3.847 ; 28.716,-6.184 29.605,-6.184 ; 28.716,-4.177 29.402,-4.177 ; 28.716,-3.923 29.123,-3.923 ; 28.742,-6.209 29.631,-6.209 ; 28.742,-4.152 29.428,-4.152 ; 28.742,-3.949 29.631,-3.949 ; 28.767,-6.235 29.656,-6.235 ; 28.767,-4.126 29.453,-4.126 ; 28.767,-3.974 29.605,-3.974 ; 28.793,-6.26 29.682,-6.26 ; 28.793,-4.101 29.478,-4.101 ; 28.793,-3.999 29.58,-3.999 ; 28.818,-6.285 29.707,-6.285 ; 28.818,-4.076 29.504,-4.076 ; 28.818,-4.025 29.555,-4.025 ; 28.843,-6.311 29.732,-6.311 ; 28.843,-4.05 29.529,-4.05 ; 28.869,-6.336 29.758,-6.336 ; 28.894,-6.362 29.783,-6.362 ; 28.92,-6.387 29.809,-6.387 ; 28.945,-6.412 29.834,-6.412 ; 28.97,-6.438 29.859,-6.438 ; 28.996,-6.463 29.885,-6.463 ; 29.021,-6.489 29.91,-6.489 ; 29.047,-6.514 29.936,-6.514 ; 29.072,-6.539 29.961,-6.539 ; 29.097,-6.565 29.986,-6.565 ; 29.123,-6.59 30.012,-6.59 ; 29.148,-6.616 30.037,-6.616 ; 29.174,-6.641 30.063,-6.641 ; 29.174,-3.923 29.656,-3.923 ; 29.199,-6.666 30.088,-6.666 ; 29.199,-3.898 29.682,-3.898 ; 29.224,-6.692 30.113,-6.692 ; 29.224,-3.872 29.707,-3.872 ; 29.25,-6.717 30.113,-6.717 ; 29.25,-3.847 29.732,-3.847 ; 29.275,-6.743 30.113,-6.743 ; 29.275,-3.822 29.758,-3.822 ; 29.301,-6.768 30.113,-6.768 ; 29.301,-4.507 29.707,-4.507 ; 29.301,-3.796 29.783,-3.796 ; 29.326,-6.793 30.113,-6.793 ; 29.326,-4.533 29.732,-4.533 ; 29.326,-3.771 29.809,-3.771 ; 29.351,-6.819 30.139,-6.819 ; 29.351,-4.558 29.758,-4.558 ; 29.351,-3.745 29.834,-3.745 ; 29.377,-6.844 30.139,-6.844 ; 29.377,-4.584 29.783,-4.584 ; 29.377,-3.72 29.859,-3.72 ; 29.402,-6.87 30.139,-6.87 ; 29.402,-4.609 29.809,-4.609 ; 29.402,-3.695 29.885,-3.695 ; 29.428,-6.895 30.139,-6.895 ; 29.428,-3.669 29.91,-3.669 ; 29.453,-6.92 30.139,-6.92 ; 29.453,-4.634 29.834,-4.634 ; 29.453,-3.644 29.936,-3.644 ; 29.478,-6.946 30.139,-6.946 ; 29.478,-3.618 29.961,-3.618 ; 29.504,-6.971 30.164,-6.971 ; 29.504,-4.66 29.859,-4.66 ; 29.504,-3.593 29.986,-3.593 ; 29.529,-6.997 30.164,-6.997 ; 29.529,-3.568 30.088,-3.568 ; 29.555,-7.022 30.164,-7.022 ; 29.555,-3.542 30.139,-3.542 ; 29.58,-7.047 30.164,-7.047 ; 29.58,-4.685 29.885,-4.685 ; 29.58,-3.517 30.164,-3.517 ; 29.605,-7.073 30.164,-7.073 ; 29.605,-3.491 30.19,-3.491 ; 29.631,-7.098 30.164,-7.098 ; 29.631,-3.466 30.215,-3.466 ; 29.656,-7.124 30.19,-7.124 ; 29.656,-4.711 29.91,-4.711 ; 29.656,-3.441 30.24,-3.441 ; 29.682,-3.415 30.24,-3.415 ; 29.707,-3.39 30.266,-3.39 ; 29.732,-4.736 29.936,-4.736 ; 29.732,-3.364 30.266,-3.364 ; 29.758,-3.339 30.266,-3.339 ; 29.758,-3.314 30.266,-3.314 ; 29.758,-3.288 30.266,-3.288 ; 29.758,-3.263 30.266,-3.263 ; 29.758,-3.237 30.24,-3.237 ; 29.783,-7.149 30.19,-7.149 ; 29.783,-3.212 30.24,-3.212 ; 29.783,-3.187 30.215,-3.187 ; 29.809,-4.761 29.961,-4.761 ; 29.809,-3.161 30.215,-3.161 ; 29.834,-3.136 30.19,-3.136 ; 29.859,-3.11 30.139,-3.11 ; 29.885,-4.787 29.986,-4.787 ; 29.91,-3.085 30.088,-3.085 ; 29.936,-7.174 30.19,-7.174 ; 29.961,-4.812 29.986,-4.812 ; 29.986,-7.632 30.215,-7.632 ; 30.012,-2.729 30.24,-2.729 ; 30.088,-7.606 30.266,-7.606 ; 30.088,-7.2 30.19,-7.2 ; 30.088,-2.755 30.266,-2.755 ; 30.139,-7.581 30.317,-7.581 ; 30.164,-2.78 30.317,-2.78 ; 30.19,-7.555 30.342,-7.555 ; 30.215,-2.806 30.342,-2.806 ; 30.24,-7.53 30.367,-7.53 ; 30.24,-2.831 30.393,-2.831 ; 30.291,-7.505 30.393,-7.505 ; 30.291,-2.856 30.418,-2.856 ; 30.317,-7.479 30.444,-7.479 ; 30.317,-2.882 30.444,-2.882 ; 30.342,-7.454 30.469,-7.454 ; 30.342,-2.907 30.469,-2.907 ; 30.367,-7.428 30.469,-7.428 ; 30.393,-7.403 30.494,-7.403 ; 30.393,-2.933 30.494,-2.933 ; 30.418,-7.378 30.52,-7.378 ; 30.418,-2.983 30.52,-2.983 ; 30.418,-2.958 30.52,-2.958 ; 30.444,-7.352 30.545,-7.352 ; 30.444,-3.009 30.545,-3.009 ; 30.469,-7.327 30.571,-7.327 ; 30.469,-3.034 30.571,-3.034 ; 30.494,-7.301 30.571,-7.301 ; 30.494,-7.276 30.596,-7.276 ; 30.494,-3.085 30.596,-3.085 ; 30.494,-3.06 30.571,-3.06 ; 30.52,-7.251 30.596,-7.251 ; 30.52,-7.225 30.621,-7.225 ; 30.52,-3.11 30.596,-3.11 ; 30.545,-7.2 30.621,-7.2 ; 30.545,-7.174 30.647,-7.174 ; 30.545,-3.187 30.647,-3.187 ; 30.545,-3.161 30.621,-3.161 ; 30.545,-3.136 30.621,-3.136 ; 30.571,-7.149 30.647,-7.149 ; 30.571,-7.124 30.647,-7.124 ; 30.571,-3.237 30.647,-3.237 ; 30.571,-3.212 30.647,-3.212 ; 30.596,-7.098 30.672,-7.098 ; 30.596,-7.073 30.672,-7.073 ; 30.596,-7.047 30.672,-7.047 ; 30.596,-7.022 30.672,-7.022 ; 30.596,-3.339 30.698,-3.339 ; 30.596,-3.314 30.672,-3.314 ; 30.596,-3.288 30.672,-3.288 ; 30.596,-3.263 30.672,-3.263 ; 30.621,-6.997 30.698,-6.997 ; 30.621,-6.971 30.698,-6.971 ; 30.621,-6.946 30.698,-6.946 ; 30.621,-6.92 30.698,-6.92 ; 30.621,-6.895 30.698,-6.895 ; 30.621,-6.87 30.698,-6.87 ; 30.621,-6.844 30.698,-6.844 ; 30.621,-6.819 30.698,-6.819 ; 30.621,-6.793 30.698,-6.793 ; 30.621,-6.768 30.698,-6.768 ; 30.621,-6.743 30.698,-6.743 ; 30.621,-6.717 30.698,-6.717 ; 30.621,-6.692 30.698,-6.692 ; 30.621,-6.666 30.698,-6.666 ; 30.621,-6.641 30.698,-6.641 ; 30.621,-6.616 30.698,-6.616 ; 30.621,-6.59 30.698,-6.59 ; 30.621,-6.565 30.698,-6.565 ; 30.621,-6.539 30.698,-6.539 ; 30.621,-6.514 30.698,-6.514 ; 30.621,-6.489 30.698,-6.489 ; 30.621,-6.463 30.698,-6.463 ; 30.621,-6.438 30.698,-6.438 ; 30.621,-6.412 30.698,-6.412 ; 30.621,-6.387 30.698,-6.387 ; 30.621,-6.362 30.698,-6.362 ; 30.621,-6.336 30.698,-6.336 ; 30.621,-6.311 30.698,-6.311 ; 30.621,-6.285 30.698,-6.285 ; 30.621,-6.26 30.698,-6.26 ; 30.621,-6.235 30.698,-6.235 ; 30.621,-6.209 30.698,-6.209 ; 30.621,-6.184 30.698,-6.184 ; 30.621,-6.158 30.698,-6.158 ; 30.621,-6.133 30.698,-6.133 ; 30.621,-6.108 30.698,-6.108 ; 30.621,-6.082 30.698,-6.082 ; 30.621,-6.057 30.698,-6.057 ; 30.621,-6.031 30.698,-6.031 ; 30.621,-6.006 30.698,-6.006 ; 30.621,-5.981 30.698,-5.981 ; 30.621,-5.955 30.698,-5.955 ; 30.621,-5.93 30.698,-5.93 ; 30.621,-5.904 30.698,-5.904 ; 30.621,-5.879 30.698,-5.879 ; 30.621,-5.854 30.698,-5.854 ; 30.621,-5.828 30.698,-5.828 ; 30.621,-5.803 30.698,-5.803 ; 30.621,-5.777 30.698,-5.777 ; 30.621,-5.752 30.698,-5.752 ; 30.621,-5.727 30.698,-5.727 ; 30.621,-5.701 30.698,-5.701 ; 30.621,-5.676 30.698,-5.676 ; 30.621,-5.65 30.698,-5.65 ; 30.621,-5.625 30.698,-5.625 ; 30.621,-5.6 30.698,-5.6 ; 30.621,-5.574 30.698,-5.574 ; 30.621,-5.549 30.698,-5.549 ; 30.621,-5.523 30.698,-5.523 ; 30.621,-5.498 30.698,-5.498 ; 30.621,-5.473 30.698,-5.473 ; 30.621,-5.447 30.698,-5.447 ; 30.621,-5.422 30.698,-5.422 ; 30.621,-5.396 30.698,-5.396 ; 30.621,-5.371 30.698,-5.371 ; 30.621,-5.346 30.698,-5.346 ; 30.621,-5.32 30.698,-5.32 ; 30.621,-5.295 30.698,-5.295 ; 30.621,-5.269 30.698,-5.269 ; 30.621,-5.244 30.698,-5.244 ; 30.621,-5.219 30.698,-5.219 ; 30.621,-5.193 30.698,-5.193 ; 30.621,-5.168 30.698,-5.168 ; 30.621,-5.142 30.698,-5.142 ; 30.621,-5.117 30.698,-5.117 ; 30.621,-5.092 30.698,-5.092 ; 30.621,-5.066 30.698,-5.066 ; 30.621,-5.041 30.698,-5.041 ; 30.621,-5.015 30.698,-5.015 ; 30.621,-4.99 30.698,-4.99 ; 30.621,-4.965 30.698,-4.965 ; 30.621,-4.939 30.698,-4.939 ; 30.621,-4.914 30.698,-4.914 ; 30.621,-4.888 30.698,-4.888 ; 30.621,-4.863 30.698,-4.863 ; 30.621,-4.838 30.698,-4.838 ; 30.621,-4.812 30.698,-4.812 ; 30.621,-4.787 30.698,-4.787 ; 30.621,-4.761 30.698,-4.761 ; 30.621,-4.736 30.698,-4.736 ; 30.621,-4.711 30.698,-4.711 ; 30.621,-4.685 30.698,-4.685 ; 30.621,-4.66 30.698,-4.66 ; 30.621,-4.634 30.698,-4.634 ; 30.621,-4.609 30.698,-4.609 ; 30.621,-4.584 30.698,-4.584 ; 30.621,-4.558 30.698,-4.558 ; 30.621,-4.533 30.698,-4.533 ; 30.621,-4.507 30.698,-4.507 ; 30.621,-4.482 30.698,-4.482 ; 30.621,-4.457 30.698,-4.457 ; 30.621,-4.431 30.698,-4.431 ; 30.621,-4.406 30.698,-4.406 ; 30.621,-4.38 30.698,-4.38 ; 30.621,-4.355 30.698,-4.355 ; 30.621,-4.33 30.698,-4.33 ; 30.621,-4.304 30.698,-4.304 ; 30.621,-4.279 30.698,-4.279 ; 30.621,-4.253 30.698,-4.253 ; 30.621,-4.228 30.698,-4.228 ; 30.621,-4.203 30.698,-4.203 ; 30.621,-4.177 30.698,-4.177 ; 30.621,-4.152 30.698,-4.152 ; 30.621,-4.126 30.698,-4.126 ; 30.621,-4.101 30.698,-4.101 ; 30.621,-4.076 30.698,-4.076 ; 30.621,-4.05 30.698,-4.05 ; 30.621,-4.025 30.698,-4.025 ; 30.621,-3.999 30.698,-3.999 ; 30.621,-3.974 30.698,-3.974 ; 30.621,-3.949 30.698,-3.949 ; 30.621,-3.923 30.698,-3.923 ; 30.621,-3.898 30.698,-3.898 ; 30.621,-3.872 30.698,-3.872 ; 30.621,-3.847 30.698,-3.847 ; 30.621,-3.822 30.698,-3.822 ; 30.621,-3.796 30.698,-3.796 ; 30.621,-3.771 30.698,-3.771 ; 30.621,-3.745 30.698,-3.745 ; 30.621,-3.72 30.698,-3.72 ; 30.621,-3.695 30.698,-3.695 ; 30.621,-3.669 30.698,-3.669 ; 30.621,-3.644 30.698,-3.644 ; 30.621,-3.618 30.698,-3.618 ; 30.621,-3.593 30.698,-3.593 ; 30.621,-3.568 30.698,-3.568 ; 30.621,-3.542 30.698,-3.542 ; 30.621,-3.517 30.698,-3.517 ; 30.621,-3.491 30.698,-3.491 ; 30.621,-3.466 30.698,-3.466 ; 30.621,-3.441 30.698,-3.441 ; 30.621,-3.415 30.698,-3.415 ; 30.621,-3.39 30.698,-3.39 ; 30.621,-3.364 30.698,-3.364
  Top Layer w0.254: -2.032,2.388 -2.032,2.896 ; -0.508,2.135 -2.032,2.642 ; -0.508,3.151 -2.032,2.642 ; 41.519,2.673 -2.032,2.642 ; 58.582,2.686 102.133,2.718 ; 100.61,2.209 102.133,2.718 ; 100.609,3.225 102.133,2.718 ; 102.134,2.464 102.133,2.972

## Polygon pours and split planes (outlines as drawn)
GND on Top Layer "Top Layer-No Net" (solid, remove dead copper, pour order 15): 32.69,-0.533 32.664,-0.508 0.356,-0.508 0.33,-0.533 0.33,-47.523 32.766,-47.523 32.715,-47.473 32.715,-0.533
GND on Bottom Layer "Top Layer-No Net" (solid, remove dead copper, pour order 16): 32.69,-0.559 32.766,-0.635 32.766,-47.549 0.381,-47.549 0.381,-0.508

## Keep-outs
Keep-Out Layer:
  lines w0.1: -1.928,0.702 102.072,0.702 ; 32.69,-0.52 0.345,-0.52 0.345,-47.523 32.741,-47.523 ; 32.73,-47.459 32.73,-0.469
  lines w0.254: -0.559,0.559 82.779,0.559 ; -0.483,-112.065 -0.483,-111.557 ; -0.457,0.686 -0.483,0.711 -0.406,-106.121 ; 1.041,-112.319 -0.483,-111.811 ; 1.041,-111.303 -0.483,-111.811 ; 33.251,-111.811 -0.483,-111.811 ; 49.045,-111.811 82.779,-111.811 ; 81.255,-112.319 82.779,-111.811 ; 81.255,-111.303 82.779,-111.811 ; 82.779,-112.065 82.779,-111.557 ; 89.207,-1.728 89.713,-0.203 ; 89.355,-108.408 89.865,-109.931 ; 89.459,-0.204 89.967,-0.203 ; 89.611,-109.932 90.119,-109.931 ; 89.777,-46.408 89.713,-0.203 ; 89.801,-63.726 89.865,-109.931 ; 90.223,-1.726 89.713,-0.203 ; 90.371,-108.406 89.865,-109.931
  text "109.728 (mm)" at 88.863,-46.664 h1.52 r270.08
  text "83.261 (mm)" at 33.505,-112.725 h1.52

## Other copper
Top Layer:
  text "104.165 (mm)" at 41.774,1.759 h1.52 r0.04